# Altium PCB Four-leg-inverter.PcbDoc (part 1 of 2)
Units mm, origin at the board's own origin, x right, y up, seen from the top; angles counter-clockwise.
Board outline 253 x 158 mm, 4 copper layers (Top Layer, Reg_pos, REG_GND, Bottom Layer), stack 0.603 mm thick; 144 components, 93 nets, 427 pads, 715 vias.
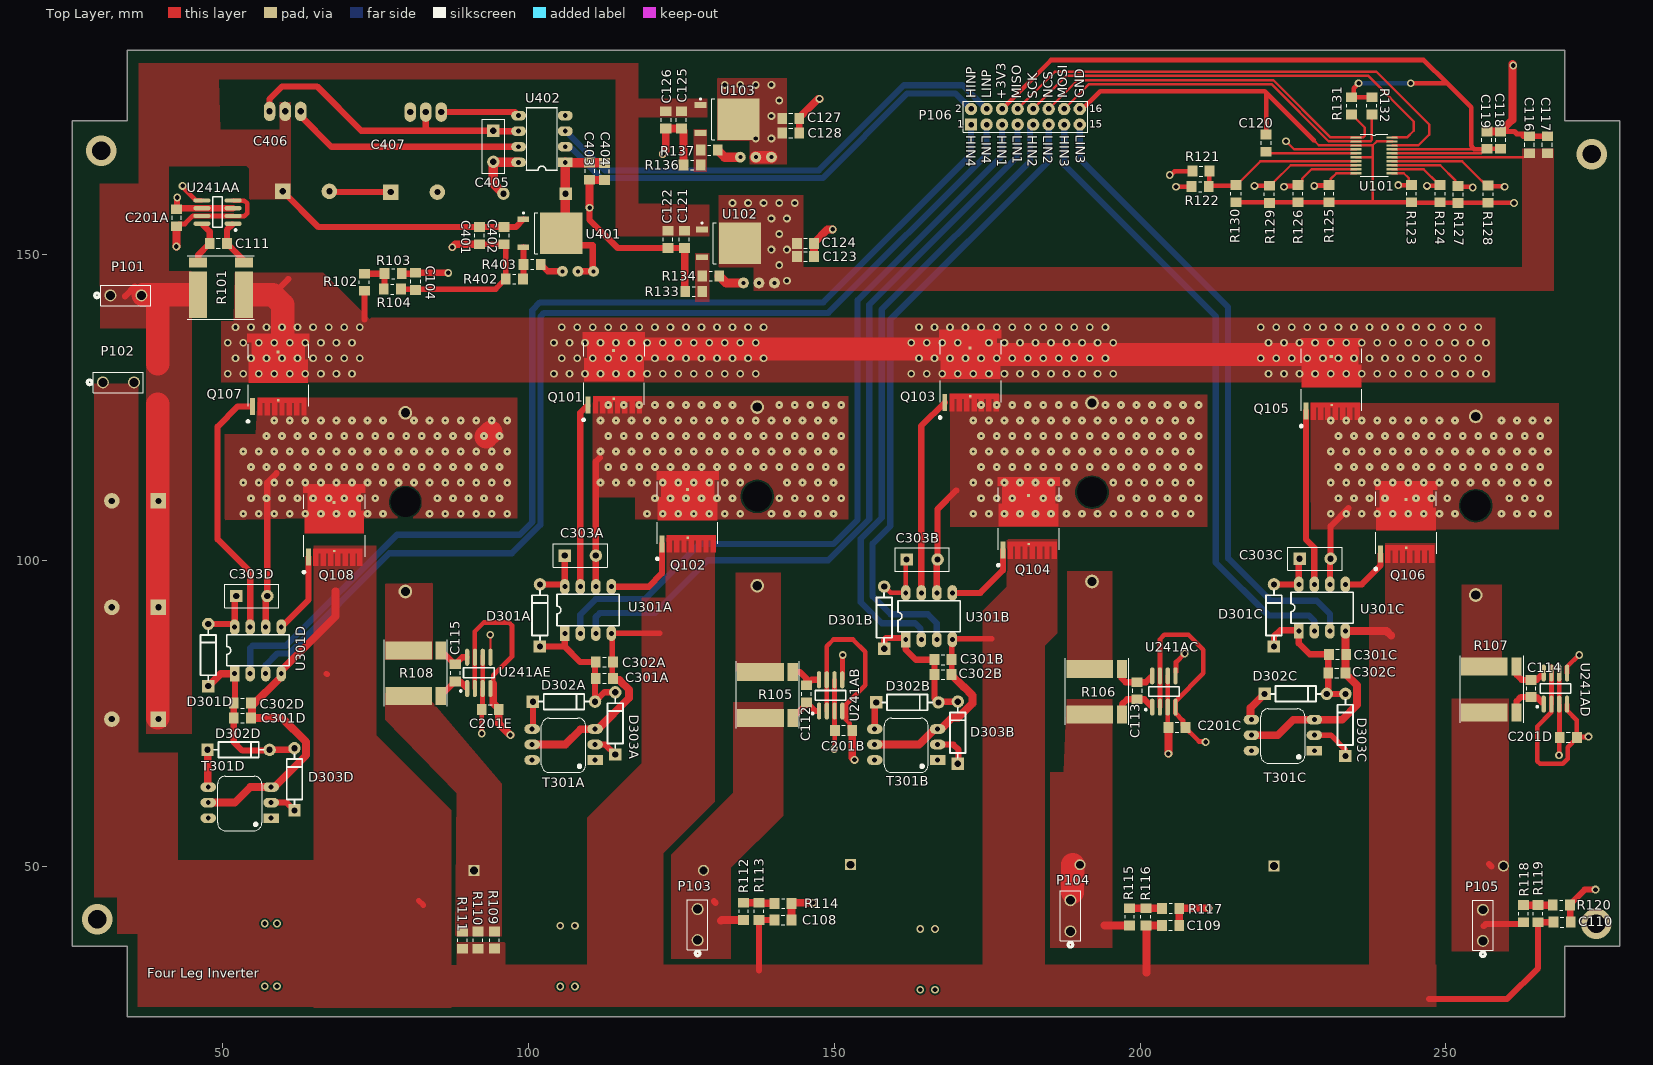
[diagram p0: Top Layer view]
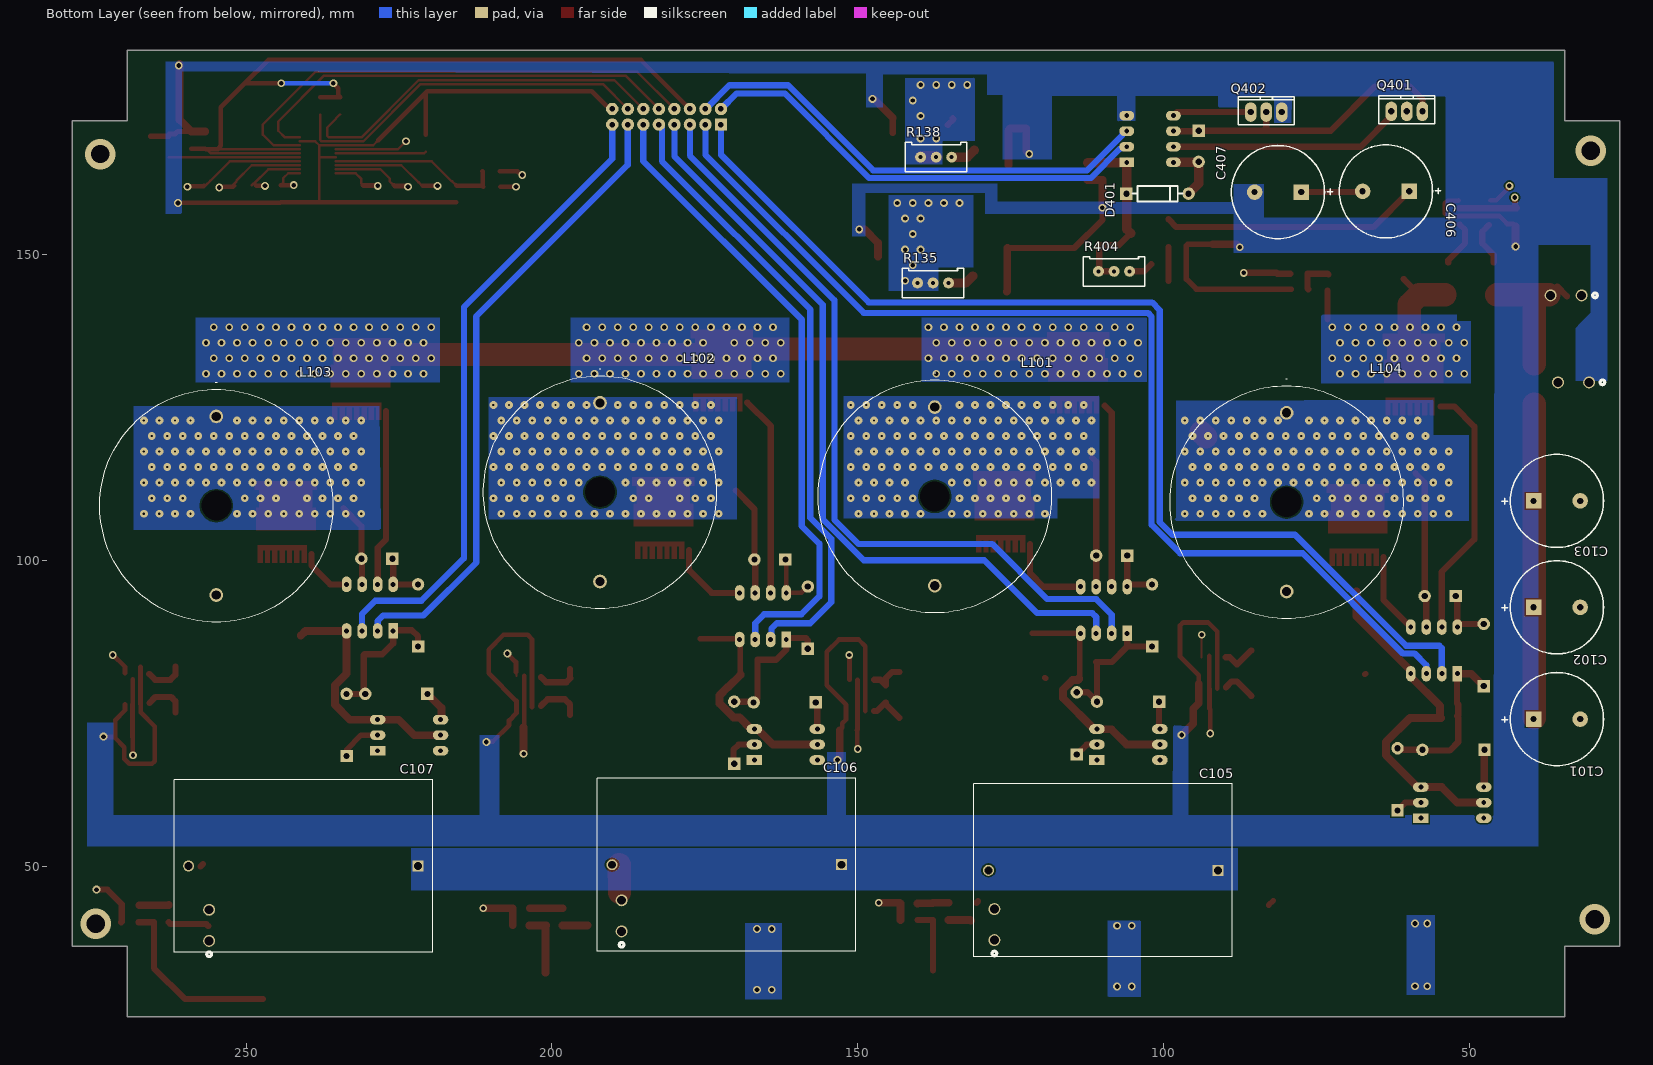
[diagram p1: Bottom Layer view, seen from below]
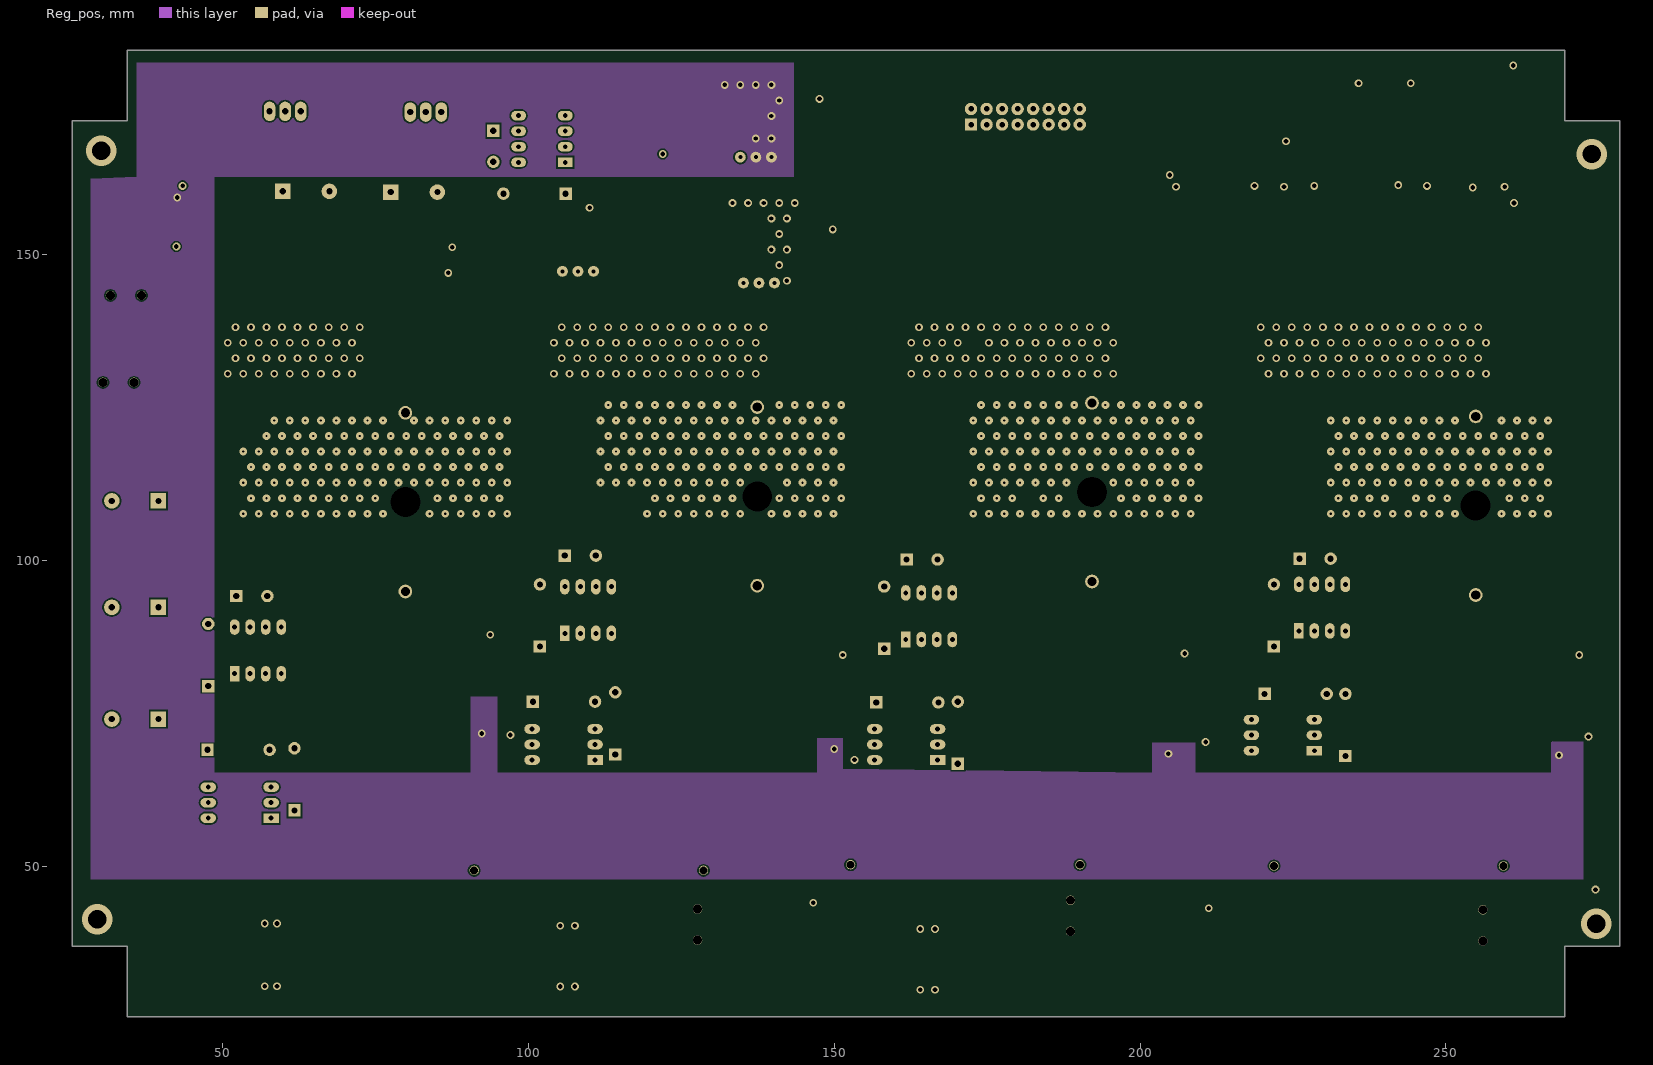
[diagram p2: Reg_pos]
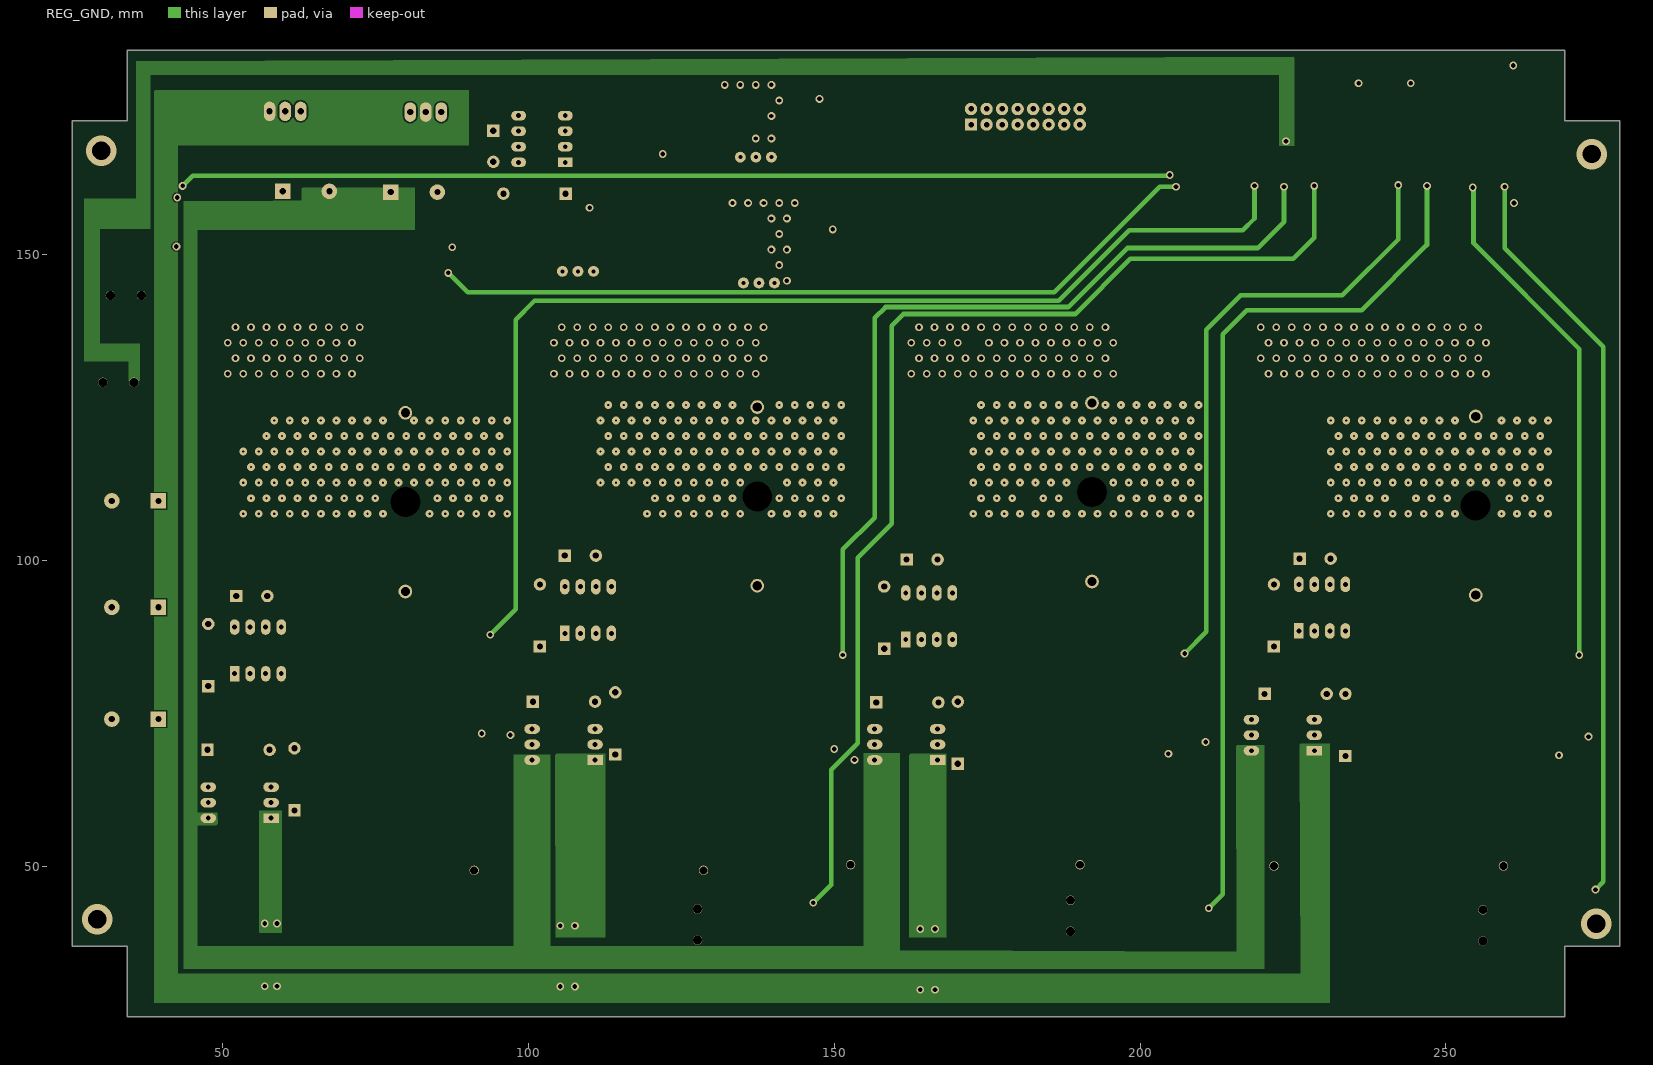
[diagram p3: REG_GND]
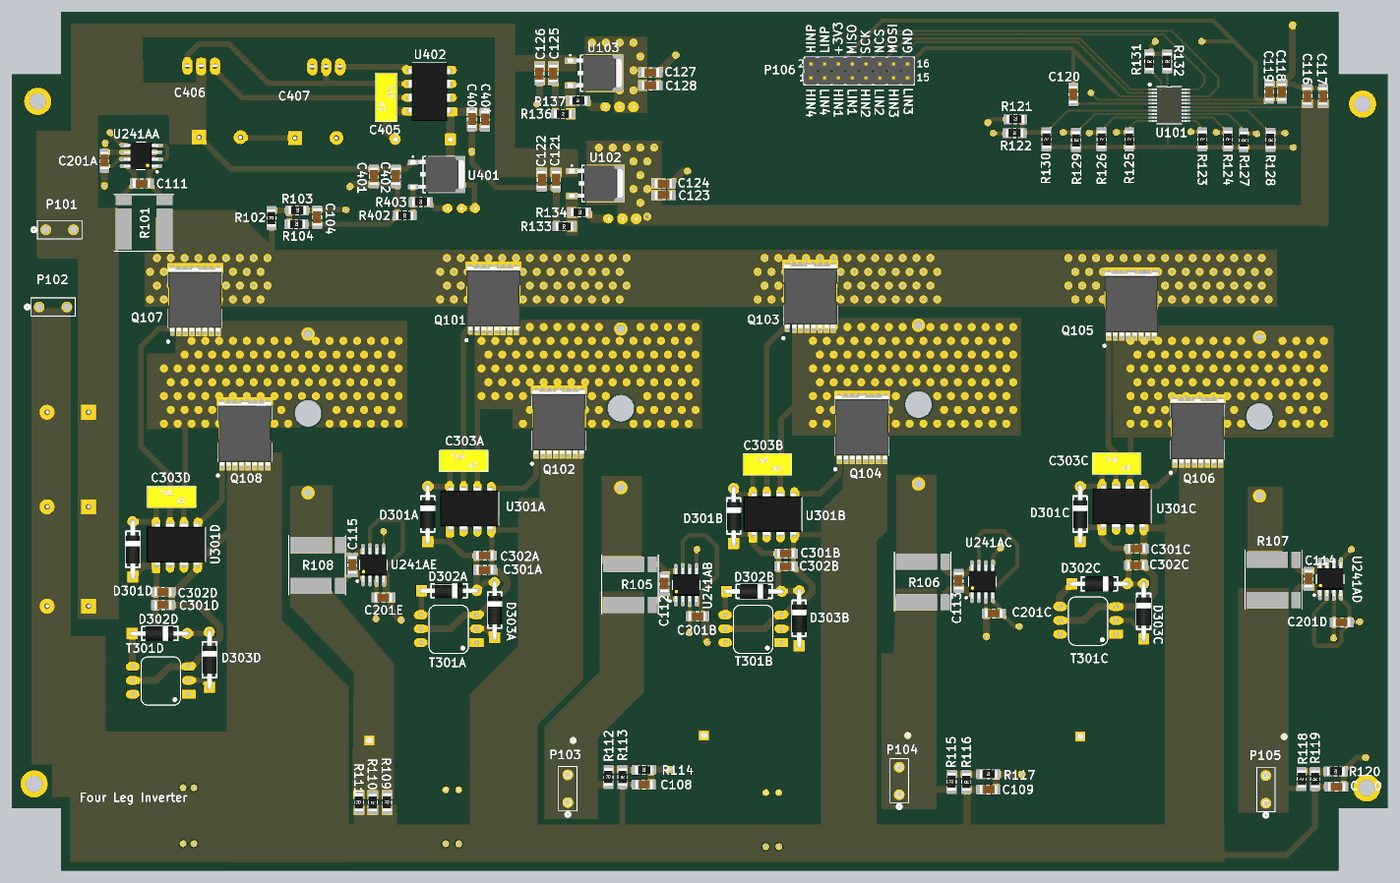
[diagram p5: 3D render of the assembled board from above, using the file's embedded part models]
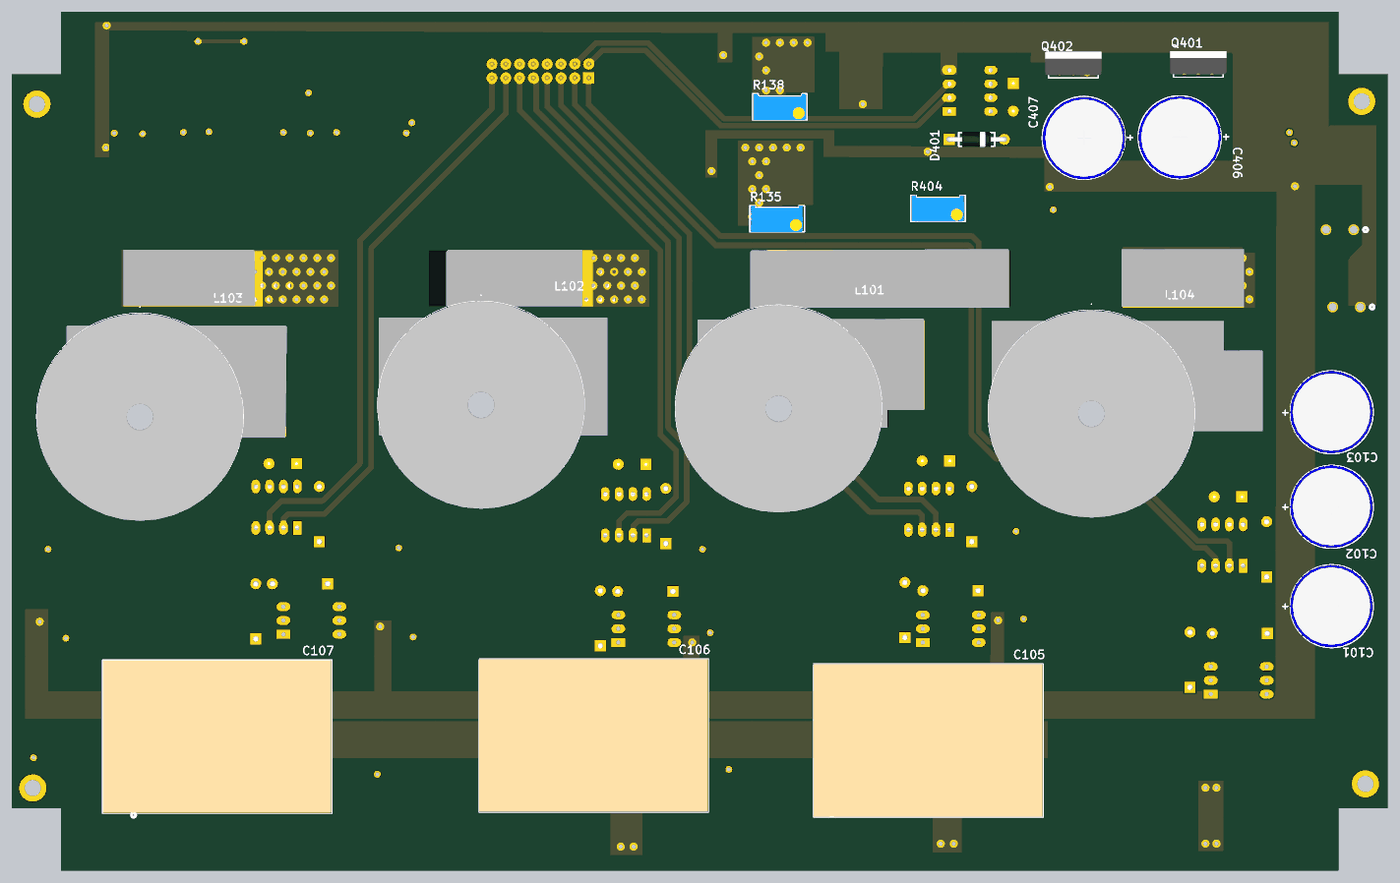
[diagram p6: 3D render of the assembled board from below, using the file's embedded part models]

## Layer stack, top to bottom
Top Solder: solder mask 0.0102, Solder Resist, Dk 3.5
Top Layer: signal copper 0.0356
Dielectric 2: prepreg 0.0711, PP-006, Dk 4.1
Reg_pos: signal copper 0.035
Dielectric 1: dielectric 0.32, FR-4, Dk 4.8
REG_GND: signal copper 0.035
Dielectric 3: prepreg 0.0711, PP-006, Dk 4.1
Bottom Layer: signal copper 0.0356
Bottom Solder: solder mask 0.0102, Solder Resist, Dk 3.5

## Board outline
25.4,36.9 25.4,171.9 34.4,171.9 34.4,183.4 269.4,183.4 269.4,171.9 278.4,171.9 278.4,36.9 269.4,36.9 269.4,25.4 34.4,25.4 34.4,36.9

## Design rules (kind name [scope] priority, off if disabled: settings)
Clearance [All] p1: gap=0.254 ignorepadtopadclearanceinfootprint=TRUE
Height [All] p1: minheight=0 maxheight=2539.975 prefheight=12.7
HoleSize [All] p1: absolutevalues=TRUE maxlimit=5 minlimit=0.025 maxpercent=80.000 minpercent=20.000
MinimumSolderMaskSliver [All] p1 off: minsoldermaskwidth=0.254
PolygonConnect PolygonConnect_20 [All vs IsNamedPolygon('Net') Or IsNamedPolygon('Net') Or IsNamedPolygon('Net') Or IsNamedPolygon('Net') Or IsNamedPolygon('Net') Or IsNamedPolygon('Net') Or IsNamedPolygon('Net') Or IsNamedPolygon('Net') Or IsNamedPolygon('Net') Or IsNamedPolygon('Net') Or IsNamedPolygon('Net') Or IsNamedPolygon('Net') Or IsNamedPolygon('Net') Or IsNamedPolygon('Net') Or IsNamedPolygon('Net') Or IsNamedPolygon('Net') Or IsNamedPolygon('+10_L01_P082') Or IsNamedPolygon('+12_L01_P087') Or IsNamedPolygon('+48_L01_P050') Or IsNamedPolygon('+48_L01_P051') Or IsNamedPolygon('+48_L01_P079') Or IsNamedPolygon('GND_L01_P045') Or IsNamedPolygon('GND_L01_P046') Or IsNamedPolygon('GND_L01_P047') Or IsNamedPolygon('GND_L01_P048') Or IsNamedPolygon('GND_L01_P049') Or IsNamedPolygon('HS-1_L01_P052') Or IsNamedPolygon('HS-1_L01_P053') Or IsNamedPolygon('HS-2_L01_P054') Or IsNamedPolygon('HS-2_L01_P055') Or IsNamedPolygon('HS-3_L01_P056') Or IsNamedPolygon('HS-3_L01_P057') Or IsNamedPolygon('HS-4_L01_P058') Or IsNamedPolygon('HS-4_L01_P059') Or IsNamedPolygon('Net') Or IsNamedPolygon('Net') Or IsNamedPolygon('Net') Or IsNamedPolygon('Net') Or IsNamedPolygon('Net') Or IsNamedPolygon('NETC105_1_L01_P063') Or IsNamedPolygon('NETC105_2_L01_P062') Or IsNamedPolygon('NETC106_2_L01_P061') Or IsNamedPolygon('NETC107_2_L01_P060') Or IsNamedPolygon('NETQ101_3_L01_P040') Or IsNamedPolygon('NETR133_2_L01_P085') Or IsNamedPolygon('NETR136_2_L01_P081') Or IsNamedPolygon('+10_L02_P089') Or IsNamedPolygon('HN_L03_P090') Or IsNamedPolygon('NETC406_2_L03_P095') Or IsNamedPolygon('NONET_L-01_P-001') Or IsNamedPolygon('NONET_L-01_P-001') Or IsNamedPolygon('NONET_L-01_P-001') Or IsNamedPolygon('NONET_L-01_P-001') Or IsNamedPolygon('+10_L04_P083') Or IsNamedPolygon('+12_L04_P088') Or IsNamedPolygon('Net') Or IsNamedPolygon('Net') Or IsNamedPolygon('Net') Or IsNamedPolygon('Net') Or IsNamedPolygon('Net') Or IsNamedPolygon('Net') Or IsNamedPolygon('Net') Or IsNamedPolygon('NONET_L-01_P-001') Or IsNamedPolygon('NONET_L-01_P-001') Or IsNamedPolygon('NONET_L-01_P-001') Or IsNamedPolygon('NONET_L-01_P-001') Or IsNamedPolygon('NONET_L-01_P-001') Or IsNamedPolygon('S')] p1: connectstyle=Direct reliefconductorwidth=0.254 reliefentries=4 polygonreliefangle="90 Angle" airgapwidth=0.254
PolygonConnect PolygonConnect_19 [All vs IsNamedPolygon('Net') Or IsNamedPolygon('Net') Or IsNamedPolygon('Net') Or IsNamedPolygon('Net') Or IsNamedPolygon('Net') Or IsNamedPolygon('Net') Or IsNamedPolygon('Net') Or IsNamedPolygon('Net') Or IsNamedPolygon('Net') Or IsNamedPolygon('Net') Or IsNamedPolygon('Net') Or IsNamedPolygon('Net') Or IsNamedPolygon('Net') Or IsNamedPolygon('Net') Or IsNamedPolygon('Net') Or IsNamedPolygon('Net') Or IsNamedPolygon('+10_L01_P082') Or IsNamedPolygon('+12_L01_P087') Or IsNamedPolygon('+48_L01_P050') Or IsNamedPolygon('+48_L01_P051') Or IsNamedPolygon('+48_L01_P079') Or IsNamedPolygon('GND_L01_P045') Or IsNamedPolygon('GND_L01_P046') Or IsNamedPolygon('GND_L01_P047') Or IsNamedPolygon('GND_L01_P048') Or IsNamedPolygon('GND_L01_P049') Or IsNamedPolygon('HS-1_L01_P052') Or IsNamedPolygon('HS-1_L01_P053') Or IsNamedPolygon('HS-2_L01_P054') Or IsNamedPolygon('HS-2_L01_P055') Or IsNamedPolygon('HS-3_L01_P056') Or IsNamedPolygon('HS-3_L01_P057') Or IsNamedPolygon('HS-4_L01_P058') Or IsNamedPolygon('HS-4_L01_P059') Or IsNamedPolygon('Net') Or IsNamedPolygon('Net') Or IsNamedPolygon('Net') Or IsNamedPolygon('Net') Or IsNamedPolygon('Net') Or IsNamedPolygon('NETC105_1_L01_P063') Or IsNamedPolygon('NETC105_2_L01_P062') Or IsNamedPolygon('NETC106_2_L01_P061') Or IsNamedPolygon('NETC107_2_L01_P060') Or IsNamedPolygon('NETQ101_3_L01_P040') Or IsNamedPolygon('NETR133_2_L01_P085') Or IsNamedPolygon('NETR136_2_L01_P081') Or IsNamedPolygon('+10_L02_P089') Or IsNamedPolygon('HN_L03_P090') Or IsNamedPolygon('NETC406_2_L03_P095') Or IsNamedPolygon('NONET_L-01_P-001') Or IsNamedPolygon('NONET_L-01_P-001') Or IsNamedPolygon('NONET_L-01_P-001') Or IsNamedPolygon('NONET_L-01_P-001') Or IsNamedPolygon('+10_L04_P083') Or IsNamedPolygon('+12_L04_P088') Or IsNamedPolygon('Net') Or IsNamedPolygon('Net') Or IsNamedPolygon('Net') Or IsNamedPolygon('Net') Or IsNamedPolygon('Net') Or IsNamedPolygon('Net') Or IsNamedPolygon('Net') Or IsNamedPolygon('NONET_L-01_P-001') Or IsNamedPolygon('NONET_L-01_P-001') Or IsNamedPolygon('NONET_L-01_P-001') Or IsNamedPolygon('NONET_L-01_P-001') Or IsNamedPolygon('NONET_L-01_P-001') Or IsNamedPolygon('S')] p2: connectstyle=Direct reliefconductorwidth=0.254 reliefentries=4 polygonreliefangle="90 Angle" airgapwidth=0.254
PolygonConnect PolygonConnect_18 [All vs IsNamedPolygon('NONET_L-01_P-001')] p3: connectstyle=Direct reliefconductorwidth=0.254 reliefentries=4 polygonreliefangle="90 Angle" airgapwidth=0.254
PolygonConnect PolygonConnect_17 [All vs IsNamedPolygon('+10_L02_P089')] p4: connectstyle=Direct reliefconductorwidth=0.254 reliefentries=4 polygonreliefangle="90 Angle" airgapwidth=0.254
PolygonConnect PolygonConnect_16 [All vs IsNamedPolygon('+10_L02_P089')] p5: connectstyle=Direct reliefconductorwidth=0.254 reliefentries=4 polygonreliefangle="90 Angle" airgapwidth=0.254
PolygonConnect PolygonConnect_15 [All vs IsNamedPolygon('+12_L06_P088')] p6: connectstyle=Direct reliefconductorwidth=0.254 reliefentries=4 polygonreliefangle="90 Angle" airgapwidth=0.254
PolygonConnect PolygonConnect_14 [All vs IsNamedPolygon('+12_L01_P087')] p7: connectstyle=Direct reliefconductorwidth=0.254 reliefentries=4 polygonreliefangle="90 Angle" airgapwidth=0.254
PolygonConnect PolygonConnect_13 [All vs IsNamedPolygon('NETR133_2_L01_P085')] p8: connectstyle=Direct reliefconductorwidth=0.254 reliefentries=4 polygonreliefangle="90 Angle" airgapwidth=0.254
PolygonConnect PolygonConnect_12 [All vs IsNamedPolygon('Net') Or IsNamedPolygon('Net') Or IsNamedPolygon('Net') Or IsNamedPolygon('Net') Or IsNamedPolygon('Net') Or IsNamedPolygon('Net') Or IsNamedPolygon('Net') Or IsNamedPolygon('Net') Or IsNamedPolygon('Net') Or IsNamedPolygon('Net') Or IsNamedPolygon('Net') Or IsNamedPolygon('Net') Or IsNamedPolygon('Net') Or IsNamedPolygon('Net') Or IsNamedPolygon('Net') Or IsNamedPolygon('Net') Or IsNamedPolygon('+10_L01_P082') Or IsNamedPolygon('+48_L01_P042') Or IsNamedPolygon('+48_L01_P043') Or IsNamedPolygon('+48_L01_P050') Or IsNamedPolygon('+48_L01_P051') Or IsNamedPolygon('+48_L01_P079') Or IsNamedPolygon('GND_L01_P045') Or IsNamedPolygon('GND_L01_P046') Or IsNamedPolygon('GND_L01_P047') Or IsNamedPolygon('GND_L01_P048') Or IsNamedPolygon('GND_L01_P049') Or IsNamedPolygon('HS-1_L01_P052') Or IsNamedPolygon('HS-1_L01_P053') Or IsNamedPolygon('HS-2_L01_P054') Or IsNamedPolygon('HS-2_L01_P055') Or IsNamedPolygon('HS-3_L01_P056') Or IsNamedPolygon('HS-3_L01_P057') Or IsNamedPolygon('HS-4_L01_P058') Or IsNamedPolygon('HS-4_L01_P059') Or IsNamedPolygon('Net') Or IsNamedPolygon('Net') Or IsNamedPolygon('Net') Or IsNamedPolygon('Net') Or IsNamedPolygon('Net') Or IsNamedPolygon('NETC105_1_L01_P063') Or IsNamedPolygon('NETC105_2_L01_P062') Or IsNamedPolygon('NETC106_2_L01_P061') Or IsNamedPolygon('NETC107_2_L01_P060') Or IsNamedPolygon('NETQ101_3_L01_P040') Or IsNamedPolygon('NETR136_2_L01_P081') Or IsNamedPolygon('+10_L02_P001') Or IsNamedPolygon('+10_L02_P002') Or IsNamedPolygon('+10_L02_P003') Or IsNamedPolygon('+12_L02_P030') Or IsNamedPolygon('+12_L02_P032') Or IsNamedPolygon('+12_L02_P035') Or IsNamedPolygon('+12_L02_P037') Or IsNamedPolygon('GND_L02_P006') Or IsNamedPolygon('GND_L02_P008') Or IsNamedPolygon('GND_L02_P009') Or IsNamedPolygon('GND_L02_P023') Or IsNamedPolygon('GND_L02_P026') Or IsNamedPolygon('GND_L02_P033') Or IsNamedPolygon('GND_L02_P034') Or IsNamedPolygon('GND_L02_P036') Or IsNamedPolygon('ISO_15V_L02_P005') Or IsNamedPolygon('+10_L06_P083') Or IsNamedPolygon('Net') Or IsNamedPolygon('Net') Or IsNamedPolygon('Net') Or IsNamedPolygon('Net') Or IsNamedPolygon('Net') Or IsNamedPolygon('Net') Or IsNamedPolygon('Net') Or IsNamedPolygon('S')] p9: connectstyle=Direct reliefconductorwidth=0.254 reliefentries=4 polygonreliefangle="90 Angle" airgapwidth=0.254
PolygonConnect PolygonConnect_11 [All vs IsNamedPolygon('Net') Or IsNamedPolygon('Net') Or IsNamedPolygon('Net') Or IsNamedPolygon('Net') Or IsNamedPolygon('Net') Or IsNamedPolygon('Net') Or IsNamedPolygon('Net') Or IsNamedPolygon('Net') Or IsNamedPolygon('Net') Or IsNamedPolygon('Net') Or IsNamedPolygon('Net') Or IsNamedPolygon('Net') Or IsNamedPolygon('Net') Or IsNamedPolygon('Net') Or IsNamedPolygon('Net') Or IsNamedPolygon('Net') Or IsNamedPolygon('+10_L01_P082') Or IsNamedPolygon('+48_L01_P042') Or IsNamedPolygon('+48_L01_P043') Or IsNamedPolygon('+48_L01_P050') Or IsNamedPolygon('+48_L01_P051') Or IsNamedPolygon('+48_L01_P079') Or IsNamedPolygon('GND_L01_P045') Or IsNamedPolygon('GND_L01_P046') Or IsNamedPolygon('GND_L01_P047') Or IsNamedPolygon('GND_L01_P048') Or IsNamedPolygon('GND_L01_P049') Or IsNamedPolygon('HS-1_L01_P052') Or IsNamedPolygon('HS-1_L01_P053') Or IsNamedPolygon('HS-2_L01_P054') Or IsNamedPolygon('HS-2_L01_P055') Or IsNamedPolygon('HS-3_L01_P056') Or IsNamedPolygon('HS-3_L01_P057') Or IsNamedPolygon('HS-4_L01_P058') Or IsNamedPolygon('HS-4_L01_P059') Or IsNamedPolygon('Net') Or IsNamedPolygon('Net') Or IsNamedPolygon('Net') Or IsNamedPolygon('Net') Or IsNamedPolygon('Net') Or IsNamedPolygon('NETC105_1_L01_P063') Or IsNamedPolygon('NETC105_2_L01_P062') Or IsNamedPolygon('NETC106_2_L01_P061') Or IsNamedPolygon('NETC107_2_L01_P060') Or IsNamedPolygon('NETQ101_3_L01_P040') Or IsNamedPolygon('NETR136_2_L01_P081') Or IsNamedPolygon('+10_L02_P001') Or IsNamedPolygon('+10_L02_P002') Or IsNamedPolygon('+10_L02_P003') Or IsNamedPolygon('+12_L02_P030') Or IsNamedPolygon('+12_L02_P032') Or IsNamedPolygon('+12_L02_P035') Or IsNamedPolygon('+12_L02_P037') Or IsNamedPolygon('GND_L02_P006') Or IsNamedPolygon('GND_L02_P008') Or IsNamedPolygon('GND_L02_P009') Or IsNamedPolygon('GND_L02_P023') Or IsNamedPolygon('GND_L02_P026') Or IsNamedPolygon('GND_L02_P033') Or IsNamedPolygon('GND_L02_P034') Or IsNamedPolygon('GND_L02_P036') Or IsNamedPolygon('ISO_15V_L02_P005') Or IsNamedPolygon('+10_L06_P083') Or IsNamedPolygon('Net') Or IsNamedPolygon('Net') Or IsNamedPolygon('Net') Or IsNamedPolygon('Net') Or IsNamedPolygon('Net') Or IsNamedPolygon('Net') Or IsNamedPolygon('Net') Or IsNamedPolygon('S')] p10: connectstyle=Direct reliefconductorwidth=0.254 reliefentries=4 polygonreliefangle="90 Angle" airgapwidth=0.254
PolygonConnect PolygonConnect_10 [All vs IsNamedPolygon('NETR136_2_L01_P081')] p11: connectstyle=Direct reliefconductorwidth=0.254 reliefentries=4 polygonreliefangle="90 Angle" airgapwidth=0.254
PolygonConnect PolygonConnect_9 [All vs IsNamedPolygon('+48_L01_P079')] p12: connectstyle=Direct reliefconductorwidth=0.254 reliefentries=4 polygonreliefangle="90 Angle" airgapwidth=0.254
PolygonConnect PolygonConnect_8 [All vs IsNamedPolygon('Net') Or IsNamedPolygon('Net') Or IsNamedPolygon('+48_L01_P042') Or IsNamedPolygon('+48_L01_P043') Or IsNamedPolygon('+48_L01_P050') Or IsNamedPolygon('+48_L01_P051') Or IsNamedPolygon('GND_L01_P045') Or IsNamedPolygon('GND_L01_P046') Or IsNamedPolygon('GND_L01_P047') Or IsNamedPolygon('GND_L01_P048') Or IsNamedPolygon('GND_L01_P049') Or IsNamedPolygon('HS-1_L01_P052') Or IsNamedPolygon('HS-1_L01_P053') Or IsNamedPolygon('HS-2_L01_P054') Or IsNamedPolygon('HS-2_L01_P055') Or IsNamedPolygon('HS-3_L01_P056') Or IsNamedPolygon('HS-3_L01_P057') Or IsNamedPolygon('HS-4_L01_P058') Or IsNamedPolygon('HS-4_L01_P059') Or IsNamedPolygon('Net') Or IsNamedPolygon('Net') Or IsNamedPolygon('Net') Or IsNamedPolygon('Net') Or IsNamedPolygon('NETC105_1_L01_P063') Or IsNamedPolygon('NETC105_2_L01_P062') Or IsNamedPolygon('NETC106_2_L01_P061') Or IsNamedPolygon('NETC107_2_L01_P060') Or IsNamedPolygon('NETQ101_3_L01_P040') Or IsNamedPolygon('+10_L02_P001') Or IsNamedPolygon('+10_L02_P002') Or IsNamedPolygon('+10_L02_P003') Or IsNamedPolygon('+12_L02_P030') Or IsNamedPolygon('+12_L02_P032') Or IsNamedPolygon('+12_L02_P035') Or IsNamedPolygon('+12_L02_P037') Or IsNamedPolygon('GND_L02_P006') Or IsNamedPolygon('GND_L02_P008') Or IsNamedPolygon('GND_L02_P009') Or IsNamedPolygon('GND_L02_P023') Or IsNamedPolygon('GND_L02_P026') Or IsNamedPolygon('GND_L02_P033') Or IsNamedPolygon('GND_L02_P034') Or IsNamedPolygon('GND_L02_P036') Or IsNamedPolygon('ISO_15V_L02_P005') Or IsNamedPolygon('Net') Or IsNamedPolygon('Net') Or IsNamedPolygon('S')] p13: connectstyle=Direct reliefconductorwidth=0.254 reliefentries=4 polygonreliefangle="90 Angle" airgapwidth=0.254
PolygonConnect PolygonConnect_7 [All vs IsNamedPolygon('+48_L01_P042') Or IsNamedPolygon('+48_L01_P043') Or IsNamedPolygon('+48_L01_P050') Or IsNamedPolygon('+48_L01_P051') Or IsNamedPolygon('GND_L01_P045') Or IsNamedPolygon('GND_L01_P046') Or IsNamedPolygon('GND_L01_P047') Or IsNamedPolygon('GND_L01_P048') Or IsNamedPolygon('GND_L01_P049') Or IsNamedPolygon('HS-1_L01_P052') Or IsNamedPolygon('HS-1_L01_P053') Or IsNamedPolygon('HS-2_L01_P054') Or IsNamedPolygon('HS-2_L01_P055') Or IsNamedPolygon('HS-3_L01_P056') Or IsNamedPolygon('HS-3_L01_P057') Or IsNamedPolygon('HS-4_L01_P058') Or IsNamedPolygon('HS-4_L01_P059') Or IsNamedPolygon('NETC105_1_L01_P063') Or IsNamedPolygon('NETC105_2_L01_P062') Or IsNamedPolygon('NETC106_2_L01_P061') Or IsNamedPolygon('NETC107_2_L01_P060') Or IsNamedPolygon('NETQ101_3_L01_P040') Or IsNamedPolygon('+10_L02_P001') Or IsNamedPolygon('+10_L02_P002') Or IsNamedPolygon('+10_L02_P003') Or IsNamedPolygon('+12_L02_P030') Or IsNamedPolygon('+12_L02_P032') Or IsNamedPolygon('+12_L02_P035') Or IsNamedPolygon('+12_L02_P037') Or IsNamedPolygon('GND_L02_P006') Or IsNamedPolygon('GND_L02_P008') Or IsNamedPolygon('GND_L02_P009') Or IsNamedPolygon('GND_L02_P023') Or IsNamedPolygon('GND_L02_P026') Or IsNamedPolygon('GND_L02_P033') Or IsNamedPolygon('GND_L02_P034') Or IsNamedPolygon('GND_L02_P036') Or IsNamedPolygon('ISO_15V_L02_P005')] p14: connectstyle=Direct reliefconductorwidth=0.254 reliefentries=4 polygonreliefangle="90 Angle" airgapwidth=0.254
PolygonConnect PolygonConnect_6 [All vs IsNamedPolygon('NETC105_1_L01_P063')] p15: connectstyle=Direct reliefconductorwidth=0.254 reliefentries=4 polygonreliefangle="90 Angle" airgapwidth=0.254
PolygonConnect PolygonConnect_5 [All vs IsNamedPolygon('NONET_L01_P003')] p16: thpad.connectstyle=Direct thpad.reliefconductorwidth=0.254 thpad.reliefentries=4 thpad.polygonreliefangle="90 Angle" thpad.airgapwidth=0.254 smdpad.connectstyle=Direct smdpad.reliefconductorwidth=0.254 smdpad.reliefentries=4 smdpad.polygonreliefangle="90 Angle" smdpad.airgapwidth=0.254 via.connectstyle=Relief via.reliefconductorwidth=0.254 via.reliefentries=4 via.polygonreliefangle="90 Angle" via.airgapwidth=0.254
PolygonConnect PolygonConnect_4 [All vs IsNamedPolygon('NONET_L01_P003')] p17: thpad.connectstyle=Direct thpad.reliefconductorwidth=0.254 thpad.reliefentries=4 thpad.polygonreliefangle="90 Angle" thpad.airgapwidth=0.254 smdpad.connectstyle=Relief smdpad.reliefconductorwidth=0.254 smdpad.reliefentries=4 smdpad.polygonreliefangle="90 Angle" smdpad.airgapwidth=0.254 via.connectstyle=Relief via.reliefconductorwidth=0.254 via.reliefentries=4 via.polygonreliefangle="90 Angle" via.airgapwidth=0.254
PolygonConnect PolygonConnect_3 [All vs IsNamedPolygon('NONET_L01_P003')] p18: thpad.connectstyle=Direct thpad.reliefconductorwidth=0.254 thpad.reliefentries=4 thpad.polygonreliefangle="90 Angle" thpad.airgapwidth=0.254 smdpad.connectstyle=Relief smdpad.reliefconductorwidth=0.254 smdpad.reliefentries=4 smdpad.polygonreliefangle="90 Angle" smdpad.airgapwidth=0.254 via.connectstyle=Relief via.reliefconductorwidth=0.254 via.reliefentries=4 via.polygonreliefangle="90 Angle" via.airgapwidth=0.254
PolygonConnect PolygonConnect_2 [All vs IsNamedPolygon('+10_L01_P001')] p19: connectstyle=Direct reliefconductorwidth=0.254 reliefentries=4 polygonreliefangle="90 Angle" airgapwidth=0.254
PolygonConnect PolygonConnect_1 [All vs IsNamedPolygon('+10_L02_P000')] p20: connectstyle=Relief reliefconductorwidth=0.254 reliefentries=4 polygonreliefangle="90 Angle" airgapwidth=0.254
PolygonConnect [All] p21: connectstyle=Relief reliefconductorwidth=0.254 reliefentries=4 polygonreliefangle="90 Angle" airgapwidth=0.254
RoutingVias [All] p1: holewidth=0.711 width=1.27 viastyle="Through Hole" minholewidth=0.711 minwidth=1.27 maxholewidth=0.711 maxwidth=1.27
SilkToSilkClearance [All] p1 off: silktosilkclearance=0.254
SilkToSolderMaskClearance [IsPad] p1 off: minsilkscreentomaskgap=0.254 clearancetoexposedcopper=TRUE
SolderMaskExpansion [All] p1: expansion=0.102 istentingtop=FALSE
SupplyNets "Schematic Supply Nets_9" [InNet('GND')] p1: voltage=0.000
SupplyNets "Schematic Supply Nets_7" [InNet('+12')] p2: voltage=0.000
SupplyNets "Schematic Supply Nets_6" [InNet('+10')] p3: voltage=0.000
SupplyNets "Schematic Supply Nets_4" [InNet('+48')] p4: voltage=0.000
SupplyNets "Schematic Supply Nets_3" [InNet('+10D')] p5: voltage=0.000
SupplyNets "Schematic Supply Nets" [InNet('+3V3')] p6: voltage=0.000
Width [All] p1: maxlimit=3.81 minlimit=0.254 preferedwidth=1.016
25 further rules are at their usual default settings.

## Classes and differential pairs
channel class GateDriver: GateDriver1 GateDriver2 GateDriver3 GateDriver4
channel class Current_Sensor: Current_Sensor1 Current_Sensor2 Current_Sensor3 Current_Sensor4 Current_Sensor5
component class Pulse_generator: C401 C402 C403 C404 C405 C406 C407 D401 Q401 Q402 R402 R403 R404 U401 U402
component class main: C101 C102 C103 C104 C105 C106 C107 C108 C109 C110 C111 C112 C113 C114 C115 C116 C117 C118 C119 C120 C121 C122 C123 C124 C125 C126 C127 C128 L101 L102 L103 L104 P101 P102 P103 P104 P105 P106 Q101 Q102 Q103 Q104 Q105 Q106 Q107 Q108 R101 R102 R103 R104 R105 R106 R107 R108 R109 R110 R111 R112 R113 R114 R115 R116 R117 R118 R119 R120 R121 R122 R123 R124 R125 R126 R127 R128 R129 R130 R131 R132 R133 R134 R135 R136 R137 R138 U101 U102 U103
component class GateDriver4: C301D C302D C303D D301D D302D D303D T301D U301D
component class GateDriver3: C301C C302C C303C D301C D302C D303C T301C U301C
component class GateDriver2: C301B C302B C303B D301B D302B D303B T301B U301B
component class GateDriver1: C301A C302A C303A D301A D302A D303A T301A U301A
component class Current_Sensor5: C201E U241AE
component class Current_Sensor4: C201D U241AD
component class Current_Sensor3: C201C U241AC
component class Current_Sensor2: C201B U241AB
component class Current_Sensor1: C201A U241AA

## Components (designator, comment, footprint, x,y, rotation, side; value= is the part's Value field where it differs from the comment)
C101 "330U" CAPP300-600_AUT 39.472,74.047 r0 bottom
C102 "330U" CAPP300-600_AUT 39.472,92.335 r0 bottom
C103 "330U" CAPP300-600_AUT 39.472,109.734 r0 bottom
C104 "82U" CAP_1206 81.534,144.215 r90 top
C105 "68 uF" B32526R3686K000 109.906,48.565 r0 bottom
C106 "68 uF" B32526R3686K000 171.45,49.479 r0 bottom
C107 "68 uF" B32526R3686K000 240.681,49.276 r0 bottom
C108 "82U" CAP_1206 140.208,41.218 r0 top
C109 "82U" CAP_1206 203.575,40.329 r0 top
C110 "82U" CAP_1206 267.589,40.837 r0 top
C111 "1U" CAP_1206 50.673,151.835 r180 top
C112 "1U" CAP_1206 145.415,76.778 r90 top
C113 "1U" CAP_1206 199.517,77.286 r90 top
C114 "1U" CAP_1206 263.906,77.667 r90 top
C115 "1U" CAP_1206 88.011,80.207 r90 top
C116 "100n" CAP_1206 263.652,169.361 r270 top
C117 "1u" CAP_1206 266.573,169.361 r270 top
C118 "100n" CAP_1206 258.953,170.123 r270 top
C119 "1u" CAP_1206 256.667,170.123 r270 top
C120 "680n" CAP_1206 220.599,169.621 r270 top
C121 "10u" CAP_1206 125.476,151.086 r90 top
C122 "100n" CAP_1206 122.809,151.086 r90 top
C123 "10u" CAP_1206 146.685,149.676 r180 top
C124 "100n" CAP_1206 146.685,151.835 r180 top
C125 "10u" CAP_1206 124.968,170.631 r90 top
C126 "100n" CAP_1206 122.428,170.631 r90 top
C127 "10u" CAP_1206 144.272,172.282 r180 top
C128 "100n" CAP_1206 144.272,169.869 r180 top
C201A "100n" CAP_1206 42.418,154.623 r90 top (schematic designator C201)
C201B "100n" CAP_1206 152.908,72.206 r180 top (schematic designator C201)
C201C "100n" CAP_1206 207.409,72.702 r180 top (schematic designator C201)
C201D "100n" CAP_1206 271.399,71.063 r180 top (schematic designator C201)
C201E "100n" CAP_1206 95.129,75.635 r180 top (schematic designator C201)
C301A "100n" CAP_1206 113.792,80.715 r180 top (schematic designator C301)
C301B "100n" CAP_1206 169.164,83.763 r180 top (schematic designator C301)
C301C "100n" CAP_1206 233.68,84.652 r180 top (schematic designator C301)
C301D "100n" CAP_1206 54.61,74.238 r180 top (schematic designator C301)
C302A "10u" CAP_1206 113.792,83.382 r180 top (schematic designator C302)
C302B "10u" CAP_1206 169.164,81.35 r180 top (schematic designator C302)
C302C "10u" CAP_1206 233.553,81.604 r180 top (schematic designator C302)
C302D "10u" CAP_1206 54.61,76.651 r180 top (schematic designator C302)
C303A "100n" RAD-0.2_AUT 108.458,100.781 r0 top (schematic designator C303)
C303B "100n" RAD-0.2_AUT 164.338,100.146 r0 top (schematic designator C303)
C303C "100n" RAD-0.2_AUT 228.6,100.273 r0 top (schematic designator C303)
C303D "100n" RAD-0.2_AUT 54.737,94.177 r0 top (schematic designator C303)
C401 "10u" CAP_1206 91.948,151.708 r90 top
C402 "100n" CAP_1206 96.012,151.708 r90 top
C403 "1u" CAP_1206 109.982,162.249 r90 top
C404 "100n" CAP_1206 112.395,162.186 r90 top
C405 "100n" RAD-0.2_AUT 94.234,167.71 r270 top
C406 "470u" CAPP300-600_AUT 59.817,160.344 r180 bottom
C407 "470u" CAPP300-600_AUT 77.47,160.217 r180 bottom
D301A "1N4007" DIODE0.4_AUT 101.854,85.922 r90 top (schematic designator D301)
D301B "1N4007" DIODE0.4_AUT 158.137,85.569 r90 top (schematic designator D301)
D301C "1N4007" DIODE0.4_AUT 221.869,85.922 r90 top (schematic designator D301)
D301D "1N4007" DIODE0.4_AUT 47.625,79.445 r90 top (schematic designator D301)
D302A "1N5819" DIODE0.4_AUT 100.711,76.905 r0 top (schematic designator D302)
D302B "1N5819" DIODE0.4_AUT 156.845,76.778 r0 top (schematic designator D302)
D302C "1N5819" DIODE0.4_AUT 220.345,78.175 r0 top (schematic designator D302)
D302D "1N5819" DIODE0.4_AUT 47.498,69.031 r0 top (schematic designator D302)
D303A "1N5819" DIODE0.4_AUT 114.173,68.269 r90 top (schematic designator D303)
D303B "1N5819" DIODE0.4_AUT 170.18,66.745 r90 top (schematic designator D303)
D303C "1N5819" DIODE0.4_AUT 233.553,68.015 r90 top (schematic designator D303)
D303D "1N5819" DIODE0.4_AUT 61.722,59.125 r90 top (schematic designator D303)
D401 "1N4007" DIODE0.4_AUT 106.045,159.963 r180 bottom
L101 "330u" 1140-331K-RC 137.389,110.465 r270 bottom
L102 "330u" 1140-331K-RC 192.126,111.15 r270 bottom
L103 "330u" 1140-331K-RC 254.864,108.941 r270 bottom
L104 "330u" 1140-331K-RC 79.858,109.525 r270 bottom
P101 "1217861-1" CONN_1217861-1_TEC 34.036,143.199 r0 top
P102 "1217861-1" CONN_1217861-1_TEC 32.817,128.981 r0 top
P103 "1217861-1" CONN_1217861-1_TEC 127.762,40.329 r90 top
P104 "1217861-1" CONN_1217861-1_TEC 188.722,41.758 r90 top
P105 "1217861-1" CONN_1217861-1_TEC 256.159,40.202 r90 top
P106 "HDR8X2" HDR2X8_AUT 172.339,171.266 r0 top
Q101 "MCTL80N20Y-TP" TOLL-8L 119.253,123.768 r90 top
Q102 "MCTL80N20Y-TP" TOLL-8L 131.318,101.035 r90 top
Q103 "MCTL80N20Y-TP" TOLL-8L 177.546,124.149 r90 top
Q104 "MCTL80N20Y-TP" TOLL-8L 187.071,100.019 r90 top
Q105 "MCTL80N20Y-TP" TOLL-8L 236.601,122.752 r90 top
Q106 "MCTL80N20Y-TP" TOLL-8L 248.793,99.384 r90 top
Q107 "MCTL80N20Y-TP" TOLL-8L 64.389,123.514 r90 top
Q108 "MCTL80N20Y-TP" TOLL-8L 73.533,98.876 r90 top
Q401 "IPP029N15NM6" TO-220V 60.198,173.425 r180 bottom
Q402 "IPP029N15NM6" TO-220V 83.185,173.298 r180 bottom
R101 "10m" WSL3673R_002-01 44.069,139.262 r0 top
R102 "1K8" RES_1206 73.152,146.882 r270 top
R103 "100R" RES_1206 79.248,146.882 r180 top
R104 "8K2" RES_1206 79.121,144.342 r180 top
R105 "10m" WSL3673R_002-01 133.731,83.636 r270 top
R106 "10m" WSL3673R_002-01 187.579,84.144 r270 top
R107 "10m" WSL3673R_002-01 252.095,84.525 r270 top
R108 "10m" WSL3673R_002-01 76.2,87.192 r270 top
R109 "0R" RES_1206 94.407,39.322 r270 top
R110 "0R" RES_1206 91.74,36.516 r90 top
R111 "0R" RES_1206 89.2,39.316 r270 top
R112 "1K8" RES_1206 135.128,44.018 r270 top
R113 "8K2" RES_1206 137.668,41.218 r90 top
R114 "100R" RES_1206 143.008,43.885 r180 top
R115 "1K8" RES_1206 198.247,43.123 r270 top
R116 "8K2" RES_1206 200.914,40.323 r90 top
R117 "100R" RES_1206 206.381,43.123 r180 top
R118 "1K8" RES_1206 262.636,43.637 r270 top
R119 "8K2" RES_1206 265.049,40.837 r90 top
R120 "100R" RES_1206 270.262,43.631 r180 top
R121 "0R" RES_1206 211.334,163.646 r180 top
R122 "0R" RES_1206 211.201,161.106 r180 top
R123 "1K" RES_1206 244.348,158.56 r90 top
R124 "1K" RES_1206 249.047,158.56 r90 top
R125 "1K" RES_1206 230.886,158.56 r90 top
R126 "1K" RES_1206 225.806,158.56 r90 top
R127 "1K" RES_1206 251.968,158.433 r90 top
R128 "1K" RES_1206 256.872,158.482 r90 top
R129 "1K" RES_1206 221.107,158.439 r90 top
R130 "1K" RES_1206 215.646,158.56 r90 top
R131 "1K" RES_1206 234.569,172.917 r90 top
R132 "1K" RES_1206 237.871,172.911 r90 top
R133 "18K2" RES_1206 125.603,143.961 r0 top
R134 "1K8" RES_1206 131.191,146.501 r180 top
R135 "500R" 3296W 137.668,145.358 r180 bottom
R136 "18K2" RES_1206 125.349,164.662 r0 top
R137 "2K2" RES_1206 130.937,167.075 r180 top
R138 "500R" 3296W 137.16,165.932 r180 bottom
R402 "18K2" RES_1206 96.266,145.993 r0 top
R403 "2K2" RES_1206 101.981,148.406 r180 top
R404 "500R" 3296W 108.077,147.263 r180 bottom
T301A "78602/9C" DIP6W_AUT 112.141,74.492 r180 top (schematic designator T301)
T301B "78602/9C" DIP6W_AUT 168.148,74.492 r180 top (schematic designator T301)
T301C "78602/9C" DIP6W_AUT 229.743,76.016 r180 top (schematic designator T301)
T301D "78602/9C" DIP6W_AUT 59.182,64.992 r180 top (schematic designator T301)
U101 "AD7328BRUZ" TSSOP20_44 234.188,162.249 r0 top
U102 "LR12K4-G" "D PAK (TO-252-3)" 126.873,155.772 r270 top
U103 "LR12K4-G" "D PAK (TO-252-3)" 126.619,176.092 r270 top
U241AA "INA241A3IDR" SOIC8_M 53.594,159.963 r180 top (schematic designator U241A)
U241AB "INA241A3IDR" SOIC8_M 152.4,73.476 r90 top (schematic designator U241A)
U241AC "INA241A3IDR" SOIC8_M 206.883,74.111 r90 top (schematic designator U241A)
U241AD "INA241A3IDR" SOIC8_M 270.891,74.594 r90 top (schematic designator U241A)
U241AE "INA241A3IDR" SOIC8_M 94.869,77.159 r90 top (schematic designator U241A)
U301A "IR2101-ND" DIP8-AUT 103.886,86.049 r0 top (schematic designator U301)
U301B "IR2101-ND" DIP8-AUT 159.639,85.033 r0 top (schematic designator U301)
U301C "IR2101-ND" DIP8-AUT 223.901,86.43 r0 top (schematic designator U301)
U301D "IR2101-ND" DIP8-AUT 49.911,79.445 r0 top (schematic designator U301)
U401 "LR12K4-G" "D PAK (TO-252-3)" 97.663,157.423 r270 top
U402 "IR2101" DIP8_AUT 107.315,174.06 r180 top

## Footprints (in the part's own frame and the unit in brackets; to place one, negate y for a bottom-side part, rotate by r counter-clockwise, add the part's x,y. Pads: shape width x height; smd on the part's side, far side on the other; paste and mask are expansions set on the pad)
1140-331K-RC [mil] "Lead Spacing = 1.15 in / 1140-331K-RC"
  round 88.31 hole 58.87: 1(-575,0) 2(575,0)
  round 96.5 hole 193 unplated: 3(0,0)
  silkscreen extent -795,-750 750,750, body extent -745,-750 755,750, height 1031
3296W [mil] "3296 - 3/8 ” Square Trimpot, Trimming Potentiometer"
  round 70 hole 25: 1(100,0) 2(-100,0) W(0,0)
  silkscreen extent -197,-95 197,95, body extent -189,-96 186,94, height 458
B32526R3686K000 [mil] "Lead Spacing 1.476\" (37.50mm)"
  rect 71x71 / inner round 60 / far side rect 71x71 hole 51 paste-99999 mask+0: 1(-740,-30)
  round 71 / inner round 60 / far side round 71 hole 51 paste-99999 mask-35.5: 2(736.38,-30)
  silkscreen extent -834,-586 830,526, body extent -827,-582 827,520, height 1673
CAP_1206 [mm] "Body 3.2 x 1.6 mm (LxW typ)"
  rect 1.6x1.8 smd: 1(0,0) 2(2.8,0)
  silkscreen extent 1.1,-0.8 1.7,0.8, body extent -0.15,-0.81 3.05,0.79, height 1.6
CAPP300-600_AUT [mil] "Capacitor, Electrolytic, Radial, Snap-In Pins; Pin Spacing 300 mil; Body 600mil (Dia)"
  rect 100x100 hole 40: 1(0,0)
  round 100 hole 40: 2(-300,0)
  silkscreen extent -450,-300 204,300, body extent -449,-302 153,300, height 599
CONN_1217861-1_TEC [mil] "Pitch = 200 Mil / pad hole size = 77 mil"
  round 77 / inner round 60 / far side round 77 hole 57 paste-99999 mask+0: 1(-95,5) 2(105,5)
  silkscreen extent -196,-62 166,72
"D PAK (TO-252-3)" [mm] "D-PAK,  Body 6.1x6.5mm, Pitch 2.28mm, Lead Span 9.7mm"
  rect 0.95x1.9 smd: 1(1.657,1.492) 3(6.217,1.492)
  rect 6.8x6.9 smd: 2(3.937,7.692)
  silkscreen extent 0.51,1.37 7.29,3.84, body extent 0.64,0.98 7.18,10.92, height 2.34
DIODE0.4_AUT [mil] "Diode, Axial; Body 5.2 x 2.7 mm (LxDia. max), Pin Distance, 400mil"
  rect 80x80 hole 40: A(0,0)
  round 80 hole 40: K(400,0)
  silkscreen extent 40,-50 360,50, body extent -18,-54 416,53, height 107
DIP6W_AUT [mil] "Wide DIL transformer"
  rect 100x62 hole 32: 1(50,281)
  oval 100x62 hole 32: 2(50,181) 3(50,81) 4(455,81) 5(455,181) 6(455,281)
  silkscreen extent 110,11 395,361
DIP8-AUT [mil] "DIP; 8 Leads; Row Spacing 7.62 mm; Pitch 2.54 mm; For AUT Manufacture"
  rect 62x100 hole 32: 1(80,80)
  oval 62x100 hole 32: 2(180,80) 3(280,80) 4(380,80) 5(380,380) 6(280,380) 7(180,380) 8(80,380)
  silkscreen extent 30,130 430,330, body extent 10,80 440,390, height 200
DIP8_AUT [mil] "DIP8 100mil pitch, 300mil row."
  rect 96x62 hole 32: 1(52,353)
  oval 96x62 hole 32: 2(52,253) 3(52,153) 4(52,53) 5(352,53) 6(352,153) 7(352,253) 8(352,353)
  silkscreen extent 102,3 302,403, body extent 47,-7 357,423, height 200
HDR2X8_AUT [mil] "Connector; Header; 8x2 Position"
  rect 80x80 hole 35.43: 1(0,0)
  round 80 hole 35.43: 2(0,100) 3(100,0) 4(100,100) 5(200,0) 6(200,100) 7(300,0) 8(300,100) 9(400,0) 10(400,100) 11(500,0) 12(500,100) 13(600,0) 14(600,100) 15(700,0) 16(700,100)
  silkscreen extent -50,-50 750,150, body extent -50,-50 750,150, height 398
RAD-0.2_AUT [mil] "Indicating Instrument; 2 Leads; Distance 200mil"
  rect 80x80 hole 40: 1(-100,0)
  round 80 hole 40: 2(100,0)
  silkscreen extent -175,-75 175,75, body extent -175,-75 175,75, height 310
RES_1206 [mm] "Body 3.2 x 1.6 mm (LxW typ)"
  rect 1.6x1.8 smd: 1(0,0) 2(2.8,0)
  silkscreen extent 1.14,-0.8 1.65,0.8, body extent -0.21,-0.8 2.96,0.75, height 0.6
SOIC8_M [mm] "SOIC8 General medium width 3-5 mm"
  oval 2.8x0.7 smd: 1(1.904,4.913) 2(1.904,3.643) 3(1.904,2.373) 4(1.904,1.103) 5(7.004,1.103) 6(7.004,2.373) 7(7.004,3.643) 8(7.004,4.913)
  silkscreen extent 1.33,0.51 5.25,6.12, body extent 1.39,0.56 7.52,5.45, height 1.76
TO-220V [mil] "TO, Thru-Hole, Transistor, Vertical, Heatsink Mounted; 3 In-Line Leads; Pitch 2.54 mm"
  oval 75x125 hole 40: 1(-100,0) 2(0,0) 3(100,0)
  silkscreen extent -180,-80 180,100, body extent -204,-59 204,110, height 762
TOLL-8L [mm] "TOLL-8L"
  rect 2.8x0.8 smd paste-2: 1(1.659,9.509)
  rect 0.4x0.4 smd paste-1 mask+0: 2(2.659,5.309)
  rect 0.5x0.5 smd paste-1 mask+0: 3(10.574,5.359)
  Top Layer region: 13.559,0.259 12.159,0.259 12.159,0.959 9.259,0.959 9.259,0.459 5.559,0.459 5.559,10.159 9.259,10.159 9.259,9.659 12.159,9.659 12.159,10.359 13.559,10.359
  Top Layer region: 3.059,0.709 0.259,0.709 0.259,1.509 2.259,1.509 2.259,1.909 0.259,1.909 0.259,2.709 2.259,2.709 2.259,3.109 0.259,3.109 0.259,3.909 2.259,3.909 2.259,4.309 0.259,4.309 0.259,5.109 2.259,5.109 2.259,5.509 0.259,5.509 0.259,6.309 2.259,6.309 2.259,6.709 0.259,6.709 0.259,7.509 2.259,7.509 2.259,7.909 0.259,7.909 0.259,8.709 3.059,8.709
  silkscreen extent -0.99,0.36 11.84,10.46, body extent 1.07,0.36 12.75,10.26, height 2.4
TSSOP20_44 [mil] "TSSOP20 4.4mm SMD DIL"
  round 30 on Top Overlay mask+2.01: 1(19,307)
  rect 70x14 smd paste+0 mask+0: 1(44,272.16) 2(44,246.57) 3(44,220.98) 4(44,195.39) 5(44,169.8) 6(44,144.2) 7(44,118.61) 8(44,93.02) 9(44,67.43) 10(44,41.84) 11(276,41.84) 12(276,67.43) 13(276,93.02) 14(276,118.61) 15(276,144.2) 16(276,169.8) 17(276,195.39) 18(276,220.98) 19(276,246.57) 20(276,272.16)
  silkscreen extent 70,22 250,293, body extent 34,27 286,287, height 47
WSL3673R_002-01 [mil] "Kelvin 4W current Shunt"
  rect 116x300 smd mask+2.01: 1(75,165) 4(369,165)
  rect 116x66 smd mask+2.01: 2(75,372) 3(369,372)
  silkscreen extent 5,5 435,415

## Part data
C101 C102 C103 C406 C407: library part CAPP300-600, "Polarized Aluminum Capacitor, Through Hole, Pitch 300mil, Body 600mil (Dia)"
C104 C108 C109 C110 C111 C112 C113 C114 C115 C116 C117 C118 C119 C120 C121 C122 C123 C124 C125 C126 C127 C128 C201A C201B C201C C201D C201E C301A C301B C301C C301D C302A C302B C302C C302D C401 C402 C403 C404: library part "CAPN 1206", "Non Polarized Capacitor, SMD, 1206"
C105 C106 C107: library part B32526R3686K000, "68 µF Film Capacitor 160V 250V Polyester, Polyethylene Terephthalate (PET), Metallized Radial /  / https://www.digikey.co.nz/en/products/detail/epcos-tdk-electronics/B32526R3686K000/3490213", ComponentLink1Description="New link", ComponentLink1URL=https://www.digikey.co.nz/en/products/detail/epcos-tdk-electronics/B32526R3686K000/3490213
C303A C303B C303C C303D C405: library part "CAPN RAD0.2", "Non Polarized Capacitor, Multilayer Ceramic Dipped Radial, Pitch 200mil"
D301A D301B D301C D301D D401: "Diode, Standard, 1A, 1000v", Supplier Part Number 1=9549129, Supplier 1=Farnell
D302A D302B D302C D302D D303A D303B D303C D303D: "Schottky Diode, 1A,40v", Supplier Part Number 1=1017589, Supplier 1=Farnell
L101 L102 L103 L104: library part 1140-331K-RC, "Power Inductors - Leaded 330uH 10% /  / https://nz.mouser.com/ProductDetail/Bourns/1140-331K-RC?qs=wiQ7G1Lt8gwP8A01VI%2FcoA%3D%3D", ComponentLink1Description="New link", ComponentLink1URL=https://nz.mouser.com/ProductDetail/Bourns/1140-331K-RC?qs=wiQ7G1Lt8gwP8A01VI%2FcoA%3D%3D
P101 P102 P103 P104 P105: "250 FASTON,PCB TAB,TCBR /  / https://www.digikey.co.nz/en/products/detail/te-connectivity-amp-connectors/1217861-1/1148769?s=N4IgTCBcDaIIIEYAMSAsBWMAVASgWgDkAREAXQF8g", ComponentLink1Description="New link", ComponentLink1URL=https://www.digikey.co.nz/en/products/detail/te-connectivity-amp-connectors/1217861-1/1148769?s=N4IgTCBcDaIIIEYAMSAsBWMAVASgWgDkAREAXQF8g
P106: "Header, 8-Pin, Dual row, 2.54mm Pitch, Straight", Supplier Part Number 1=9733620, Supplier 1=Farnell
Q101 Q102 Q103 Q104 Q105 Q106 Q107 Q108: "N-Channel 200 V 80A (Tc) 250W (Tj) Surface Mount TOLL-8L"
Q401: library part FQP65N06, "Insulated-Gate Field-Effect Transistor (IGFET), N-Channel, Enhancement, Body Diode, Pin 1 Gate, 2 Drain, 3 Source, 3 Pins- Through Hole TO-220-3"
Q402: library part FQP65N06, "Insulated-Gate Field-Effect Transistor (IGFET), N-Channel, Enhancement, Body Diode, Pin 1 Gate, 2 Drain, 3 Source, 3 Pins - Through Hole TO-220-3"
R101 R105 R106 R107 R108: library part WSL3673R-01, "Current Shunt  / Kelvin 4W 0.002- 0.01"
R102 R103 R104 R109 R110 R111 R112 R113 R114 R115 R116 R117 R118 R119 R120 R121 R122 R123 R124 R125 R126 R127 R128 R129 R130 R131 R132 R133 R134 R136 R137 R402 R403: library part "Resistor 1206", "Resistor, SMD, 1206"
R135 R138 R404: library part 3296W-1-104LF, "3296W Series, 3/8 ” Square Potentiometer, 100k, 10%,  0.5 Watts, Multi Turn /  / Part #: PV36W501C01B00", Supplier Part Number 1=9353194, Supplier 1=Farnell
T301A T301B T301C T301D: "Pulse transformer 1:1:1"
U101: "ADC 12 Bit / Package TSSOP20"
U102 U103 U401: "Adj Positive Regulator  / Linear. 12V dropout V.  / 2W"
U241AA U241AB U241AC U241AD U241AE: "Current Sense Amp"
U301A U301B U301C U301D: "Half-Bridge Gate Driver IC Non-Inverting 8-PDIP"
U402: library part IR2101_DIP, "Half - Bridge Driver, MOSFET/IGBT, DIP8", Supplier Part Number 1=8638829, Supplier 1=Farnell

## Via types
v1: diameter 1.27, hole 0.381, Top Layer to Bottom Layer, 436 vias
v2: diameter 1.27, hole 0.711, Top Layer to Bottom Layer, 228 vias
v3: diameter 1.27, hole 0.762, Top Layer to Bottom Layer, 47 vias
v4: diameter 5, hole 3, Top Layer to Bottom Layer, 4 vias

## Nets (pads, with @x,y where several pads share a name; then routed paths per layer and width w, separated by ;. In a path a pad name is that pad's centre, name@x,y a point inside that pad or via, vN(x,y) a via of type N, cw(c..) or ccw(c..) an arc to the next point about the centre after c; other vN are vias at no path point)
+3V3: C118.2 C119.2 P106.6 R131.2 R132.2 U101.16 U101.17 | length 144.3
  Top Layer w0.381: U101.16@241.198,166.562 255.806,166.562 256.456,167.212 256.567,167.323 C119.2@256.667,167.323 ; U101.17@241.198,167.212 254.573,167.212
  Top Layer w0.762: P106.6@177.419,173.806 185.42,181.807 246.38,181.807 250.19,177.997 ; v3(235.712,177.997) 234.897,177.182 234.897,176.045 R131.2@234.569,175.717 234.572,175.714 237.868,175.714 R132.2@237.871,175.711 ; v3(244.221,177.997) 250.19,177.997 ; 254.573,167.212 256.456,167.212 256.556,167.212 C119.2@256.667,167.323 C118.2@258.953,167.323 ; 254.573,167.323 254.127,167.769 254.127,174.06 250.19,177.997
  Bottom Layer w0.762: v3(235.712,177.997) v3(244.221,177.997)
+10: C127.2 C128.2 C201A.2 C201B.2 C201C.2 C201D.2 C201E.2 R138.2 R138.W U103.2 U241AA.3 U241AA.6 U241AB.3 U241AB.6 U241AC.3 U241AC.6 U241AD.3 U241AD.6 U241AE.3 U241AE.6 | length 65
  Top Layer w0.762: v3(92.329,71.698) C201E.2@92.329,75.635 92.465,75.771 92.465,79.032 U241AE.3@92.496,79.063 U241AE.6@92.496,84.358 ; U241AE.6@92.496,84.163 U241AE.6@92.496,84.358 ; v3(149.981,69.158) 150.045,69.222 150.045,72.143 C201B.2@150.108,72.206 150.027,72.287 U241AB.3@150.027,75.38 U241AB.6@150.027,80.48 ; U241AC.6@204.51,81.115 U241AC.3@204.51,76.015 204.51,72.801 C201C.2@204.609,72.702 ; v2(268.478,68.142) 268.539,68.203 268.539,71.043 268.518,71.063 268.549,71.094 268.549,76.467 U241AD.3@268.518,76.498 U241AD.6@268.518,80.579
  Top Layer w1.016: C201A.2@42.235,157.57 46.57,157.57 U241AA.6@46.59,157.59 U241AA.3@51.69,157.59 ; C201A.2@42.235,157.677 42.458,157.677 42.496,157.715 42.496,159.279 v3(42.545,159.328) ; U103.2@134.438,172.282 U103.2@134.311,172.155 U103.2@135.255,171.211
  Top Layer w1.27: C201C.2@204.609,72.702 204.615,72.696 v3(204.615,68.384)
  Top Layer w2.032: R138.W@137.16,165.932 R138.2@139.7,165.932
  other v2: 137.16,168.98 139.7,168.98 139.7,172.663 140.97,175.203 132.08,177.743 134.62,177.743 137.16,177.743 139.7,177.743
+10D: C403.2 C404.2 D401.A R404.2 R404.W U401.2 U402.1 | length 31.1
  Top Layer w1.016: U401.2@105.355,153.486 107.33,151.512 110.49,151.512 110.49,147.39 R404.2@110.617,147.263 R404.W@108.077,147.263
  Top Layer w1.524: U401.2@105.355,153.486 105.994,154.125 U402.1@105.994,165.094 106.051,165.037 C404.2@112.395,165.037
+12: C116.2 C117.2 C123.2 C124.2 R135.2 R135.W U101.15 U102.2 | length 21.4
  Top Layer w0.381: U101.15@241.206,165.904 262.636,165.904
  other v2: 142.24,145.739 140.97,148.279 139.7,150.819 142.24,150.819 140.97,153.359 139.7,155.899 142.24,155.899 133.35,158.439 135.89,158.439 138.43,158.439 140.97,158.439 143.51,158.439
+48: C101.1 C102.1 C103.1 C121.2 C122.2 C125.2 C126.2 C401.2 C402.2 C406.1 P101.1 P101.2 Q401.2 R101.1 U102.1 U103.1 U401.1 | length 116.4
  Top Layer w1.016: 34.036,143.199 35.624,144.787 ; C406.1@59.563,160.598 C406.1@59.817,160.344 65.653,154.508 C401.2@91.948,154.508 C402.2@96.012,154.508 97.897,154.508 U401.1@99.155,155.766
  Top Layer w3.81: P101.2@36.957,143.453 39.37,143.453 ; C101.1@39.37,74.238 39.37,109.925 39.37,125.544 ; 39.37,132.152 39.37,143.453 ; R101.1@45.511,143.395 45.454,143.453 39.37,143.453
  Bottom Layer w1.016: Q401.2@59.944,173.171 Q401.2@60.198,173.425